# Altium PCB PCB 0817.PcbDoc (part 2 of 2)
Units mil, origin at the board's own origin, x right, y up, seen from the top; angles counter-clockwise.
Board outline 9370 x 8640 mil, 2 copper layers (Top Layer, Bottom Layer); 60 components, 203 nets, 811 pads, 245 vias.
Unrouted connection lines stored in the file: 129.
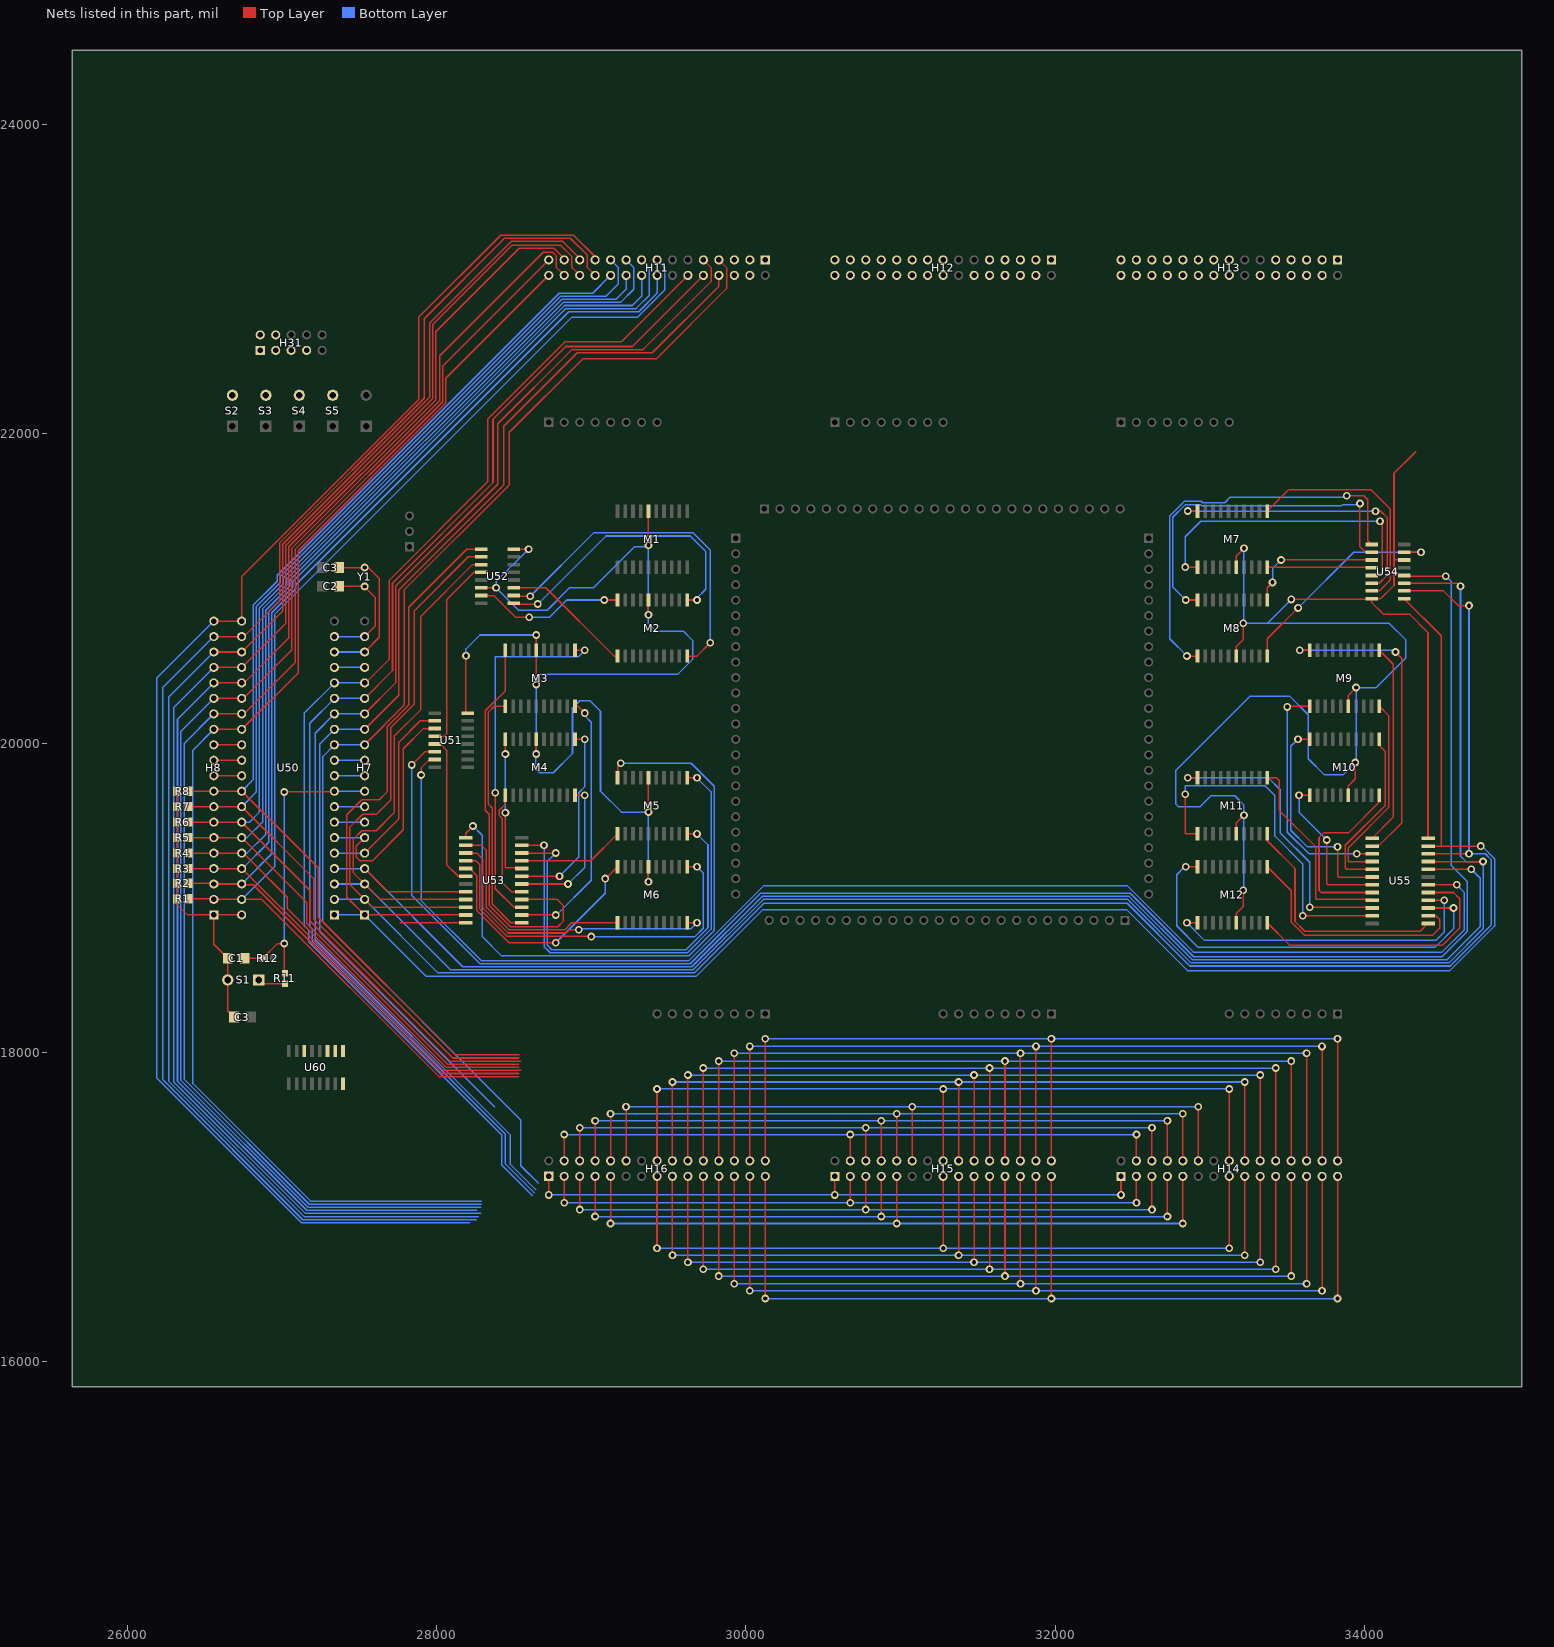
[diagram p2: the nets of this part, all layers, seen from the top]

## Via types
v1: diameter 50, hole 28, Top Layer to Bottom Layer, 245 vias

## Nets (pads, with @x,y where several pads share a name; then routed paths per layer and width w, separated by ;. In a path a pad name is that pad's centre, name@x,y a point inside that pad or via, vN(x,y) a via of type N, cw(c..) or ccw(c..) an arc to the next point about the centre after c; other vN are vias at no path point) (continued)
NetM2_1: M2.1 U52.11 | length 852.4
  Top Layer w10: U52.11@28500.32,21005 28706.57,21005 29147.67,20563.9 M2.1@29170,20563.9
NetM2_10: M2.10 U52.10 | length 2265.7
  Top Layer w10: U52.10@28505.32,20950 v1(28605,20950) ; M2.10@29620,20563.9 29683.9,20563.9 v1(29770,20650)
  Bottom Layer w10: v1(28605,20950) 29015,21360 29660,21360 29770,21250 v1(29770,20650)
NetM2_11: M2.11 U52.9 | length 1859.4
  Top Layer w10: U52.9@28505.32,20900 v1(28655,20900) ; M2.11@29620,20926.1 v1(29683.9,20926.1)
  Bottom Layer w10: v1(28655,20900) 29095,21340 29640,21340 29740,21240 29740,20995 29683.9,20938.9 v1(29683.9,20926.1)
NetM2_20: M2.20 U52.7 | length 984.3
  Top Layer w10: U52.7@28289.69,20955 28370,20955 28510,20815 v1(28600,20815) ; v1(29083.9,20926.1) M2.20@29170,20926.1
  Bottom Layer w10: v1(28600,20815) 28730,20815 28841.1,20926.1 v1(29083.9,20926.1)
NetM3_1: M3.1 U53.1 | length 1618.3
  Top Layer w10: M3.1@28445,20238.9 28372.18,20238.9 28335,20201.72 28335,19605 28360,19580 28360,18960 28480,18840 U53.1@28551.1,18840
NetM3_10: M3.10 U53.2 | length 1736.2
  Top Layer w10: U53.2@28551.1,18890 v1(28770,18890) ; M3.10@28895,20238.9 28915,20238.9 v1(28958.9,20195)
  Bottom Layer w10: v1@28755,18890 28775,18890 29000,19115 29000,20135 28958.9,20176.1 v1(28958.9,20195)
NetM3_11: M3.11 U53.3 | length 2385.6
  Top Layer w10: v1(28380,19680) 28380,19060 28500,18940 U53.3@28551.1,18940 ; M3.11@28895,20601.1 v1(28958.9,20601.1)
  Bottom Layer w10: v1@28380,19675 v1(28380,19680) 28380,20560 28917.8,20560 v1(28958.9,20601.1)
NetM3_20: M3.20 U53.4 | length 2651.7
  Top Layer w10: M3.20@28445,20601.1 28445,20340 28315,20210 28315,19566.72 28340,19541.72 28340,18951.72 28478.53,18813.19 28783.19,18813.19 28820,18850 28820,18950 28780,18990 U53.4@28551.1,18990
NetM4_1: M4.1 U53.5 | length 739.7
  Top Layer w10: M4.1@28445,19663.9 28445,19606.57 28405,19566.57 28405,19533.43 28425,19513.43 28425,19100 28485,19040 U53.5@28551.1,19040
NetM4_10: M4.10 U53.6 | length 981.8
  Top Layer w10: U53.6@28551.1,19090 v1(28850,19090) ; M4.10@28895,19663.9 v1(28958.9,19663.9)
  Bottom Layer w10: v1(28850,19090) 28958.9,19198.9 v1(28958.9,19663.9)
NetM4_11: M4.11 U53.7 | length 1261.8
  Top Layer w10: U53.7@28551.1,19140 v1(28795,19140) ; M4.11@28895,20026.1 v1(28958.9,20026.1)
  Bottom Layer w10: v1(28795,19140) 28918.9,19263.9 28918.9,19680.47 28958.9,19720.47 v1(28958.9,20026.1)
NetM4_20: M4.20 U53.8 | length 939.3
  Top Layer w10: v1(28445,19550) 28445,19195 28546.1,19195 U53.8@28551.1,19190 ; v1(28445,19930) M4.20@28445,20026.1
  Bottom Layer w10: v1(28445,19550) v1(28445,19930)
NetM5_1: M5.1 U53.9 | length 690.9
  Top Layer w10: U53.9@28551.1,19240 28996.1,19240 M5.1@29170,19413.9
NetM5_10: M5.10 U53.10 | length 2648.4
  Top Layer w10: U53.10@28551.1,19290 v1(28770,19290) ; M5.10@29620,19413.9 v1(29683.9,19413.9)
  Bottom Layer w10: v1(28770,19290) 28715,19235 28715,18695 28745,18665 29613.43,18665 29755,18806.57 29755,19342.8 v1(29683.9,19413.9)
NetM5_11: M5.11 U53.11 | length 3038.4
  Top Layer w10: U53.11@28551.1,19340 v1(28695,19340) ; M5.11@29620,19776.1 v1(29683.9,19776.1)
  Bottom Layer w10: v1(28695,19340) 28695,18685 28735,18645 29621.72,18645 29775,18798.28 29775,19685 v1(29683.9,19776.1)
NetM5_20: M5.20 U53.13 | length 4154.3
  Top Layer w10: U53.13@28188.9,19390 28188.9,19418.9 v1(28235,19465) ; M5.20@29170,19776.1 29170,19850 v1(29190,19870)
  Bottom Layer w10: v1(28235,19465) 28295,19405 28295,18750 28420,18625 29630,18625 29795,18790 29795,19721.57 29646.57,19870 v1(29190,19870)
NetM6_1: M6.1 U53.14 | length 1441.3
  Top Layer w10: U53.14@28188.9,19340 28290,19340 28320,19310 28320,18943.43 28470.24,18793.19 28828.28,18793.19 28873.99,18838.9 M6.1@29170,18838.9
NetM6_10: M6.10 U53.15 | length 1984.6
  Top Layer w10: U53.15@28188.9,19290 28260,19290 28300,19250 28300,18935.15 28461.96,18773.19 28836.57,18773.19 28858.38,18795 v1(28920,18795) ; M6.10@29620,18838.9 v1(29683.9,18838.9)
  Bottom Layer w10: v1(28920,18795) 28925,18800 29645,18800 v1(29683.9,18838.9)
NetM6_11: M6.11 U53.16 | length 2406.8
  Top Layer w10: U53.16@28188.9,19240 28255,19240 28280,19215 28280,18926.86 28453.67,18753.19 28996.81,18753.19 v1(29000,18750) ; M6.11@29620,19201.1 v1(29683.9,19201.1)
  Bottom Layer w10: v1(29000,18750) 29670.15,18750 29723.9,18803.75 29723.9,19161.1 v1(29683.9,19201.1)
NetM6_20: M6.20 U53.17 | length 1571.8
  Top Layer w10: U53.17@28188.9,19190 28215.23,19190 28260,19145.23 28260,18918.58 28468.58,18710 v1(28770,18710) ; v1(29090,19125) 29093.9,19125 M6.20@29170,19201.1
  Bottom Layer w10: v1(28770,18710) 29090,19030 v1(29090,19125)
NetM7_1: M7.1 U54.15 | length 1513.6
  Top Layer w10: M7.1@33370,21501.1 33508.9,21640 34040,21640 34165,21515 34165,21055 34095,20985 U54.15@34044.68,20985
NetM7_10: M7.10 U54.14 | length 1865.4
  Top Layer w10: v1(32856.1,21501.1) M7.10@32920,21501.1 ; U54.14@34044.68,21035 34095,21035 34145,21085 34145,21460 34105,21500 v1(34070,21500)
  Bottom Layer w10: v1(32856.1,21501.1) v1@34070,21501.1
NetM7_11: M7.11 U54.13 | length 1986.5
  Top Layer w10: v1(32840,21138.9) M7.11@32920,21138.9 ; U54.13@34044.68,21085 34085,21085 34115,21115 34115,21420 v1(34100,21435)
  Bottom Layer w10: v1(32840,21138.9) 32840,21335 32940,21435 v1(34100,21435)
NetM7_20: M7.20 U54.12 | length 670.8
  Top Layer w10: M7.20@33370,21138.9 U54.12@34040.79,21138.9
NetM8_1: M8.1 U54.11 | length 880.9
  Top Layer w10: M8.1@33370,20926.1 33370,21005 v1(33405,21040) ; v1(33460,21185) U54.11@34044.68,21185
  Bottom Layer w10: v1(33405,21040) 33405,21130 v1(33460,21185)
NetM8_10: M8.10 U54.10 | length 2267.2
  Top Layer w10: v1(32843.9,20926.1) M8.10@32920,20926.1 ; v1(33970,21550) 33970,21270 34005,21235 U54.10@34044.68,21235
  Bottom Layer w10: v1(32843.9,20926.1) 32760,21010 32760,21461.57 32839.53,21541.1 32939.05,21541.1 32945.15,21535 33848.28,21535 33854.39,21541.1 33961.1,21541.1 v1(33970,21550)
NetM8_11: M8.11 U54.9 | length 2673.6
  Top Layer w10: v1(32851.1,20563.9) M8.11@32920,20563.9 ; v1(33885,21600) 33995,21600 34020,21575 34020,21309.68 U54.9@34044.68,21285
  Bottom Layer w10: v1(32851.1,20563.9) 32740,20675 32740,21469.85 32835.15,21565 32943.43,21565 32953.43,21555 33095,21555 33130,21590 33875,21590 v1(33885,21600)
NetM8_20: M8.20 U54.7 | length 1447.7
  Top Layer w10: M8.20@33370,20563.9 33370,20675 v1(33570,20875) ; U54.7@34255.31,21235 v1(34365,21235)
  Bottom Layer w10: v1(33570,20875) 33930,21235 v1(34365,21235)
NetM9_1: M9.1 U55.1 | length 1310.3
  Top Layer w10: U55.1@34047.64,19385 34185,19522.36 34185,20511.1 M9.1@34095,20601.1
NetM9_10: M9.10 U55.2 | length 2021.1
  Top Layer w10: v1(33581.1,20601.1) M9.10@33645,20601.1 ; U55.2@34090,19335 34240,19485 34240,20550 v1(34200,20590)
  Bottom Layer w10: v1(33581.1,20601.1) 34188.9,20601.1 v1(34200,20590)
NetM9_11: M9.11 U55.3 | length 1568.5
  Top Layer w10: v1(33500,20235) 33503.9,20238.9 M9.11@33645,20238.9 ; v1(33950,19285) U55.3@34048.9,19285
  Bottom Layer w10: v1@33500,20240 v1(33500,20235) 33500,19425 33640,19285 v1(33950,19285)
NetM9_20: M9.20 U55.4 | length 1289.1
  Top Layer w10: U55.4@34047.64,19235 33895,19235 33895,19325 34155,19585 34155,20178.9 M9.20@34095,20238.9
NetM10_1: M10.1 U55.5 | length 1130.8
  Top Layer w10: U55.5@34047.64,19185 33885,19185 33875,19195 33875,19340 34133.36,19598.36 34133.36,19946.64 34095,19985 M10.1@34095,20026.1
NetM10_10: M10.10 U55.6 | length 1445.4
  Top Layer w10: v1(33568.9,20026.1) M10.10@33645,20026.1 ; v1(33825,19330) 33825,19140 33830,19135 U55.6@34047.64,19135
  Bottom Layer w10: v1(33568.9,20026.1) 33522.8,19980 33522.8,19437.2 33630,19330 v1(33825,19330)
NetM10_11: M10.11 U55.7 | length 1011.6
  Top Layer w10: v1(33576.1,19663.9) M10.11@33645,19663.9 ; v1(33755,19375) 33755,19090 33760,19085 U55.7@34047.64,19085
  Bottom Layer w10: v1(33576.1,19663.9) 33576.1,19553.9 v1(33755,19375)
NetM10_20: M10.20 U55.8 | length 1218
  Top Layer w10: U55.8@34047.64,19035 33720,19035 33705,19050 33705,19390 33735,19420 33895,19420 34095,19620 M10.20@34095,19663.9
NetM11_1: M11.1 U55.9 | length 1310.7
  Top Layer w10: M11.1@33370,19776.1 33432.33,19776.1 33448.31,19760.12 33448.31,19565.59 33685,19328.9 33685,18990 U55.9@34042.64,18990
NetM11_10: M11.10 U55.10 | length 1937.7
  Top Layer w10: v1(32856.1,19776.1) M11.10@32920,19776.1 ; v1(33645,18940) 34042.64,18940 U55.10@34047.64,18935
  Bottom Layer w10: v1(32856.1,19776.1) 33378.9,19776.1 33455,19700 33455,19420 33645,19230 v1(33645,18940)
NetM11_11: M11.11 U55.11 | length 2296.8
  Top Layer w10: v1(32840,19670) 32840,19413.9 M11.11@32920,19413.9 ; v1(33600,18885) U55.11@34047.64,18885
  Bottom Layer w10: v1(32840,19670) 32840,19726.1 33353.9,19726.1 33420,19660 33420,19400 33600,19220 v1(33600,18885)
NetM11_20: M11.20 U55.13 | length 1546.9
  Top Layer w10: M11.20@33370,19413.9 33370,19370 33550,19190 33550,18848.28 33613.28,18785 34359.84,18785 U55.13@34409.84,18835
NetM12_1: M12.1 U55.14 | length 1574.7
  Top Layer w10: M12.1@33370,19201.1 33525,19046.1 33525,18845 33610,18760 34440,18760 34485,18805 34485,18860 34460,18885 U55.14@34409.84,18885
NetM12_10: M12.10 U55.15 | length 2684
  Top Layer w10: v1(32843.9,19201.1) M12.10@32920,19201.1 ; U55.15@34409.84,18935 v1(34575,18935)
  Bottom Layer w10: v1(32843.9,19201.1) 32836.1,19201.1 32785,19150 32785,18820 32925,18680 34455,18680 34575,18800 v1(34575,18935)
NetM12_11: M12.11 U55.16 | length 2112.9
  Top Layer w10: v1(32851.1,18838.9) M12.11@32920,18838.9 ; U55.16@34409.84,18985 v1(34515,18985)
  Bottom Layer w10: v1(32851.1,18838.9) 32965,18725 34460,18725 34515,18780 v1(34515,18985)
NetM12_20: M12.20 U55.17 | length 1761.9
  Top Layer w10: M12.20@33370,18838.9 33513.9,18695 34505,18695 34615,18805 34615,18995 34575,19035 U55.17@34409.84,19035
NetR11_1: R11.1 S1.1 | length 179.7
  Top Layer w10: S1.1@26850,18470 26873.46,18446.54 R11.1@27020,18446.54
NetU51_4: U51.4 U52.4 | length 1247.7
  Top Layer w10: U51.4@27989.69,20045 28050,20045 28065,20060 28065,20928.28 28241.72,21105 U52.4@28289.69,21105
NetU51_5: U51.5 U53.18 | length 986.8
  Top Layer w10: U51.5@27989.69,19995 28025,19995 28065,19955 28065,19215 28140,19140 U53.18@28188.9,19140
NetU51_6: U51.6 U54.4 | length 11093.5
  Top Layer w10: v1(27840,19860) 27925,19945 U51.6@27989.69,19945 ; U54.4@34255.31,21085 34260.31,21080 v1@34530,21080
  Bottom Layer w10: v1(27840,19860) 27840,19015 28280,18575 29640,18575 30095,19030 32484.85,19030 32894.85,18620 34500,18620 34665,18785 34665,19105 34560,19210 34560,21045 v1(34525,21080)
NetU51_7: U51.7 U55.18 | length 8810
  Top Layer w10: v1(27900,19795) 27900,19840 27955,19895 U51.7@27989.69,19895 ; U55.18@34414.84,19085 v1@34600,19085
  Bottom Layer w10: v1(27900,19795) 27900,18983.28 28288.28,18595 29631.72,18595 30116.72,19080 32463.14,19080 32893.14,18650 34500,18650 34645,18795 34645,19035 v1(34595,19085)
OS0: H11.3 H12.3 H13.3 H14.3 H15.3 H16.3 H31.1 S2.2 | length 4210
  Top Layer w10: v1(28825,17030) H16.3@28825,17200 ; v1(30675,17030) H15.3@30675,17200 ; v1(32525,17030) H14.3@32525,17200
  Bottom Layer w10: v1(28825,17030) v1(32525,17030)
OS1: H11.4 H12.4 H13.4 H14.4 H15.4 H16.4 H31.3 S3.2 | length 4210
  Top Layer w10: H16.4@28825,17300 v1(28825,17470) ; H15.4@30675,17300 v1(30675,17470) ; H14.4@32525,17300 v1(32525,17470)
  Bottom Layer w10: v1(28825,17470) v1(32525,17470)
OS2: H11.5 H12.5 H13.5 H14.5 H15.5 H16.5 H31.5 S4.2 | length 4359.1
  Top Layer w10: v1(28925,16985) H16.5@28925,17200 ; v1(30775,16985) H15.5@30775,17200 ; v1(32625,16985) H14.5@32625,17200
  Bottom Layer w10: v1@28930,16980 v1(28925,16985) v1(32625,16985) v1@32630,16980
P1: H7.1 U50.1 U52.1 U53.23 U54.1 U55.23 | length 14270.3
  Top Layer w10: U53.23@28188.9,18890 H7.1@27535,18890 27420,19005 27420,19537.97 27516.56,19634.53 27629.53,19634.53 27680,19685 27680,20106.72 27820,20246.72 27820,20880 28195,21255 U52.1@28289.69,21255 ; U54.1@34255.31,20935 34255.31,20934.69 34495,20695 34495,19335 ; U55.23@34411.1,19335 34495,19335 ; v1(34750,19335) 34495,19335
  Bottom Layer w10: U50.1@27340,18890 H7.1@27535,18890 27930,18495 29680,18495 30110,18925 32460.27,18925 32855,18530.27 32855,18530 34551.57,18530 34840,18818.43 34840,19253.28 34758.28,19335 v1(34750,19335)
P2: H7.2 U50.2 U52.2 U53.22 U54.2 U55.22 | length 14432.4
  Top Layer w10: U53.22@28188.9,18940 27585,18940 H7.2@27535,18990 27440,19085 27440,19457.97 27520,19537.97 27520,19540 27610,19540 27705,19635 27705,20103.43 27855,20253.43 27855,20855 28205,21205 U52.2@28289.69,21205 ; U54.2@34255.31,20985 34510,20985 34605,20890 v1(34675,20890) ; U55.22@34411.1,19285 v1(34675,19285)
  Bottom Layer w10: U50.2@27340,18990 H7.2@27535,18990 28010,18515 29666.57,18515 30116.57,18965 32465,18965 32870,18560 34553.28,18560 34820,18826.72 34820,19245 34780,19285 v1(34675,19285) v1(34675,20890)
P3: H7.3 U50.3 U52.3 U53.21 U54.3 U55.21 | length 14396.5
  Top Layer w10: U53.21@28188.9,18990 27635,18990 H7.3@27535,19090 27460,19165 27460,19377.97 27516.56,19434.53 27609.53,19434.53 27725,19550 27725,20045 27898.69,20218.69 27898.69,20821.31 28232.39,21155 U52.3@28289.69,21155 ; U54.3@34255.31,21035 34600,21035 v1(34620,21015) ; U55.21@34411.1,19235 v1(34765,19235)
  Bottom Layer w10: U50.3@27340,19090 H7.3@27535,19090 28090,18535 29658.28,18535 30113.28,18990 32468.28,18990 32878.28,18580 34545,18580 34768.28,18803.28 34768.28,19231.72 v1(34765,19235) 34655,19235 34620,19270 v1(34620,21015)
P4: H7.4 U50.4 U53.20 U55.20 | length 9507.7
  Top Layer w10: H7.4@27535,19190 27685,19040 U53.20@28188.9,19040 ; U55.20@34411.1,19185 v1(34690,19185)
  Bottom Layer w10: U50.4@27340,19190 H7.4@27535,19190 28170,18555 29650,18555 30105,19010 32476.57,19010 32886.57,18600 34533.28,18600 34748.28,18815 34748.28,19126.72 v1(34690,19185)
P5: H7.5 U50.5 U51.2 | length 1293.8
  Top Layer w10: H7.5@27535,19290 27755,19510 27755,20005 27895,20145 U51.2@27989.69,20145
  Bottom Layer w10: U50.5@27340,19290 H7.5@27535,19290
P6: H7.6 U50.6 U51.3 | length 1524.5
  Top Layer w10: H7.6@27535,19390 27480,19335 27480,19265 27505,19240 27585,19240 27785,19440 27785,19965 27915,20095 U51.3@27989.69,20095
  Bottom Layer w10: U50.6@27340,19390 H7.6@27535,19390
P7: H7.7 U50.7 U60.1 | length 195
  Bottom Layer w10: U50.7@27340,19490 H7.7@27535,19490
P8: H7.8 U50.8 U60.2 | length 195
  Bottom Layer w10: U50.8@27340,19590 H7.8@27535,19590
P9: C1.2 H7.9 R11.2 R12.2 U50.9 | length 1983
  Top Layer w10: C1.2@26760,18610 R12.2@26876.54,18610 26971.54,18705 v1(27015,18705) R11.2@27015,18518.46 ; v1(27015,19685) 27335,19685 U50.9@27340,19690
  Bottom Layer w10: v1(27015,18705) v1(27015,19685) ; U50.9@27340,19690 H7.9@27535,19690
P10: H7.10 U50.10 | length 195
  Bottom Layer w10: U50.10@27340,19790 H7.10@27535,19790
P11: H7.11 U50.11 | length 195
  Bottom Layer w10: U50.11@27340,19890 H7.11@27535,19890
P12: H7.12 H11.7 H12.7 H13.7 H14.7 H15.7 H16.7 U50.12 | length 12521.2
  Top Layer w10: H7.12@27535,19990 27790,20245 27790,20990 28470,21670 28470,22010 28945,22485 29420,22485 29875,22940 29875,23075.29 H11.7@29825.33,23124.96 ; v1(29025,16940) H16.7@29025,17200 ; v1(30875,16940) H15.7@30875,17200 ; v1(32725,16940) H14.7@32725,17200
  Bottom Layer w10: H7.12@27535,19990 U50.12@27340,19990 27265,19915 27265,18845 28545,17565 28545,17268.28 28658.28,17155 ; v1(29025,16940) v1(32725,16940)
P13: H7.13 H11.8 H12.8 H13.8 H14.8 H15.8 H16.8 U50.13 | length 11790.2
  Top Layer w10: H7.13@27535,20090 27755,20310 27755,20990 28435,21670 28435,22050 28910,22525 29395,22525 29825.33,22955.33 H11.8@29825.33,23024.96 ; H16.8@29025,17300 v1(29025,17560) ; H15.8@30875,17300 v1(30875,17560) ; H14.8@32725,17300 v1(32725,17560)
  Bottom Layer w10: H7.13@27535,20090 U50.13@27340,20090 27245,19995 27245,18780 28375,17650 ; v1(29025,17560) v1(32725,17560)
P14: H7.14 H11.9 H12.9 H13.9 H14.9 H15.9 H16.9 U50.14 | length 12694
  Top Layer w10: H7.14@27535,20190 27735,20390 27735,21015 28395,21675 28395,22065 28875,22545 29335,22545 29775,22985 29775,23075.29 H11.9@29725.33,23124.96 ; v1(29125,16895) H16.9@29125,17200 ; v1(30975,16895) H15.9@30975,17200 ; v1(32825,16895) H14.9@32825,17200
  Bottom Layer w10: H7.14@27535,20190 U50.14@27340,20190 27215,20065 27215,18730 28475,17470 28475,17280 28640,17115 ; v1@29130,16890 v1(29125,16895) v1(32825,16895) v1@32830,16890
P15: H7.15 H11.10 H12.10 H13.10 H14.10 H15.10 H16.10 U50.15 | length 12580.4
  Top Layer w10: H7.15@27535,20290 27715,20470 27715,21035 28365,21685 28365,22095 28835,22565 29265.37,22565 H11.10@29725.33,23024.96 ; H16.10@29125,17300 v1(29125,17605) ; H15.10@30975,17300 v1(30975,17605) ; H14.10@32825,17300 v1(32825,17605)
  Bottom Layer w10: H7.15@27535,20290 U50.15@27340,20290 27180,20130 27180,18815 27195,18800 27195,18721.72 28445,17471.72 28445,17280 28630,17095 ; v1@29130,17610 v1(29125,17605) v1(32825,17605) v1@32830,17610
P16: H7.16 H11.12 H12.12 H13.12 H14.12 H15.12 H16.12 U50.16 | length 12669.5
  Top Layer w10: H7.16@27535,20390 27540,20390 27695,20545 27695,21055 28330,21690 28330,22095 28830,22595 29195.37,22595 H11.12@29625.33,23024.96 ; H16.12@29225,17300 v1(29225,17650) ; H15.12@31075,17300 v1(31075,17650) ; H14.12@32925,17300 v1(32925,17650)
  Bottom Layer w10: H7.16@27535,20390 U50.16@27340,20390 27145,20195 27145,18820 27175,18790 27175,18713.43 28420,17468.43 28420,17275 28620,17075 ; v1(29225,17650) v1(32925,17650)
P17: H7.17 U50.17 U60.3 | length 195
  Bottom Layer w10: U50.17@27340,20490 H7.17@27535,20490
P18: C3.2@27370.12,21135 H7.18 U50.18 Y1.1 | length 997.6
  Top Layer w10: C3.2@27371.14,21136.02 Y1.1@27535,21136.02 27558.98,21136.02 27630,21065 27630,20685 H7.18@27535,20590
  Bottom Layer w10: U50.18@27340,20590 H7.18@27535,20590
P19: C2.1 H7.19 U50.19 Y1.2 | length 740.8
  Top Layer w10: C2.1@27371.14,21013.98 Y1.2@27535,21013.98 27535,21010 27605,20940 27605,20760 H7.19@27535,20690
  Bottom Layer w10: U50.19@27340,20690 H7.19@27535,20690
P21: H8.20 H11.23 H12.23 H13.23 H14.23 H15.23 H16.23 U50.21 | length 15211.3
  Top Layer w10: H8.20@26560,20790 U50.21@26740,20790 26740,21077.99 27885,22222.99 27885,22755 28415,23285 28885,23285 29025.33,23144.67 H11.23@29025.33,23124.96 ; v1(29825,16555) H16.23@29825,17200 ; v1(31675,16555) H15.23@31675,17200 ; v1(33525,16555) H14.23@33525,17200
  Bottom Layer w10: H8.20@26560,20790 26190,20420 26190,17837.01 27127.01,16900 28215,16900 ; v1(29825,16555) v1(33525,16555)
P22: H8.19 H11.24 H12.24 H13.24 H14.24 H15.24 H16.24 U50.22 | length 15235.8
  Top Layer w10: H8.19@26560,20690 U50.22@26740,20690 26755,20690 26985,20920 26985,21294.71 27920,22229.71 27920,22745 28440,23265 28865,23265 28975,23155 28975,23075.29 H11.24@29025.33,23024.96 ; H16.24@29825,17300 v1(29825,17945) ; H15.24@31675,17300 v1(31675,17945) ; H14.24@33525,17300 v1(33525,17945)
  Bottom Layer w10: H8.19@26560,20690 26230,20360 26230,17825.29 27135.29,16920 28255,16920 ; v1(29825,17945) v1(33525,17945)
P23: H8.18 H11.25 H12.25 H13.25 H14.25 H15.25 H16.25 U50.23 | length 15096.9
  Top Layer w10: H8.18@26560,20590 U50.23@26740,20590 27005,20855 27005,21286.42 27955,22236.42 27955,22715 28485,23245 28815,23245 28925.33,23134.67 H11.25@28925.33,23124.96 ; v1(29925,16505) H16.25@29925,17200 ; v1(31775,16505) H15.25@31775,17200 ; v1(33625,16505) H14.25@33625,17200
  Bottom Layer w10: H8.18@26560,20590 26270,20300 26270,17813.58 27143.58,16940 28270,16940 ; v1(29925,16505) v1(33625,16505)
P24: H8.17 H11.26 H12.26 H13.26 H14.26 H15.26 H16.26 U50.24 | length 15102.7
  Top Layer w10: H8.17@26560,20490 U50.24@26740,20490 27025,20775 27025,21278.14 27975,22228.14 27975,22706.72 28488.28,23220 28802.01,23220 28875,23147.01 28875,23075.29 H11.26@28925.33,23024.96 ; H16.26@29925,17300 v1(29925,17995) ; H15.26@31775,17300 v1(31775,17995) ; H14.26@33625,17300 v1(33625,17995)
  Bottom Layer w10: H8.17@26560,20490 26300,20230 26300,17811.86 27151.86,16960 28285,16960 ; v1(29925,17995) v1(33625,17995)
P25: H8.16 H11.27 H12.27 H13.27 H14.27 H15.27 H16.27 U50.25 | length 14942.5
  Top Layer w10: H8.16@26560,20390 U50.25@26740,20390 26755,20390 27045,20680 27045,21269.85 27995,22219.85 27995,22660 28534.96,23199.96 28760.04,23199.96 28825.33,23134.67 H11.27@28825.33,23124.96 ; v1(30025,16460) H16.27@30025,17200 ; v1(31875,16460) H15.27@31875,17200 ; v1(33725,16460) H14.27@33725,17200
  Bottom Layer w10: H8.16@26560,20390 26325,20155 26325,17815.15 27160.15,16980 28260,16980 ; v1(30025,16460) v1(33725,16460)
P26: H8.15 H11.28 H12.28 H13.28 H14.28 H15.28 H16.28 U50.26 | length 14876.5
  Top Layer w10: H8.15@26560,20290 U50.26@26740,20290 26750,20290 27065,20605 27065,21261.57 28020,22216.57 28020,22505 28689.96,23174.96 28750.04,23174.96 28775,23150 28775,23075.29 H11.28@28825.33,23024.96 ; H16.28@30025,17300 v1(30025,18040) ; H15.28@31875,17300 v1(31875,18040) ; H14.28@33725,17300 v1(33725,18040)
  Bottom Layer w10: H8.15@26560,20290 26345,20075 26345,17823.43 27168.43,17000 28285,17000 ; v1(30025,18040) v1(33725,18040)
P27: H8.14 H11.29 H12.29 H13.29 H14.29 H15.29 H16.29 U50.27 | length 14712.2
  Top Layer w10: H8.14@26560,20190 U50.27@26740,20190 26755,20190 27085,20520 27085,21253.28 28040,22208.28 28040,22439.63 H11.29@28725.33,23124.96 ; v1(30125,16410) H16.29@30125,17200 ; v1(31975,16410) H15.29@31975,17200 ; v1(33825,16410) H14.29@33825,17200
  Bottom Layer w10: H8.14@26560,20190 26370,20000 26370,17826.72 27176.72,17020 28290,17020 ; v1(30125,16410) v1(33825,16410)
P28: H8.13 H11.30 H12.30 H13.30 H14.30 H15.30 H16.30 U50.28 | length 14533
  Top Layer w10: H8.13@26560,20090 U50.28@26740,20090 27105,20455 27105,21245 28060,22200 28060,22359.63 H11.30@28725.33,23024.96 ; H16.30@30125,17300 v1(30125,18090) ; H15.30@31975,17300 v1(31975,18090) ; H14.30@33825,17300 v1(33825,18090)
  Bottom Layer w10: H8.13@26560,20090 26425,19955 26425,17800 27185,17040 28290,17040 ; v1(30125,18090) v1(33825,18090)
P29: H8.12 U50.29 | length 180
  Top Layer w10: H8.12@26560,19990 U50.29@26740,19990
P30: H8.11 U50.30 | length 180
  Top Layer w10: H8.11@26560,19890 U50.30@26740,19890
P31: H8.10 U50.31 | length 180
  Top Layer w10: H8.10@26560,19790 U50.31@26740,19790
P32: H8.9 H11.22 H12.22 H13.22 H14.22 H15.22 H16.22 R8.2 U50.32 | length 12981.3
  Top Layer w10: R8.2@26397.4,19690 H8.9@26560,19690 U50.32@26740,19690 27235,19195 27235,18875 28125,17985 28535,17985 ; H16.22@29725,17300 v1(29725,17900) ; H15.22@31575,17300 v1(31575,17900) ; H14.22@33425,17300 v1(33425,17900)
  Bottom Layer w10: U50.32@26740,19690 26815,19765 26815,20892.99 26970,21047.99 26970,21086.42 28793.58,22910 29010.37,22910 H11.22@29125.33,23024.96 ; v1(29725,17900) v1(33425,17900)
P33: H8.8 H11.21 H12.21 H13.21 H14.21 H15.21 H16.21 R7.2 U50.33 | length 13193.9
  Top Layer w10: R7.2@26397.4,19590 H8.8@26560,19590 U50.33@26740,19590 27205,19125 27205,18865 28105,17965 28530,17965 ; v1(29725,16600) H16.21@29725,17200 ; v1(31575,16600) H15.21@31575,17200 ; v1(33425,16600) H14.21@33425,17200
  Bottom Layer w10: U50.33@26740,19590 26835,19685 26835,20884.71 26990,21039.71 26990,21078.14 28801.86,22890 29095.04,22890 29175,22969.96 29175,23075.29 H11.21@29125.33,23124.96 ; v1(29725,16600) v1(33425,16600)
P34: H8.7 H11.20 H12.20 H13.20 H14.20 H15.20 H16.20 R6.2 U50.34 | length 13067.4
  Top Layer w10: R6.2@26397.4,19490 H8.7@26560,19490 U50.34@26740,19490 27180,19050 27180,18851.72 28086.72,17945 28545,17945 ; H16.20@29625,17300 v1(29625,17855) ; H15.20@31475,17300 v1(31475,17855) ; H14.20@33325,17300 v1(33325,17855)
  Bottom Layer w10: U50.34@26740,19490 26790,19490 26855,19555 26855,20876.42 27010,21031.42 27010,21069.85 28810.15,22870 29160,22870 29225.33,22935.33 H11.20@29225.33,23024.96 ; v1(29625,17855) v1(33325,17855)
P35: H8.6 H11.19 H12.19 H13.19 H14.19 H15.19 H16.19 R5.2 U50.35 | length 13227.2
  Top Layer w10: R5.2@26397.4,19390 H8.6@26560,19390 U50.35@26740,19390 27160,18970 27160,18835 28070,17925 28530,17925 ; v1(29625,16645) H16.19@29625,17200 ; v1(31475,16645) H15.19@31475,17200 ; v1(33325,16645) H14.19@33325,17200
  Bottom Layer w10: U50.35@26740,19390 26775,19390 26875,19490 26875,20868.14 27030,21023.14 27030,21061.57 28818.43,22850 29190,22850 29275,22935 29275,23075.29 H11.19@29225.33,23124.96 ; v1(29625,16645) v1(33325,16645)
P36: H8.5 H11.18 H12.18 H13.18 H14.18 H15.18 H16.18 R4.2 U50.36 | length 13062.3
  Top Layer w10: R4.2@26397.4,19290 H8.5@26560,19290 U50.36@26740,19290 26750,19290 27035,19005 27035,18931.72 28061.72,17905 28530,17905 ; H16.18@29525,17300 v1(29525,17810) ; H15.18@31375,17300 v1(31375,17810) ; H14.18@33225,17300 v1(33225,17810)
  Bottom Layer w10: U50.36@26740,19290 26775,19290 26895,19410 26895,20859.85 27050,21014.85 27050,21053.28 28826.72,22830 29265,22830 29325.33,22890.33 H11.18@29325.33,23024.96 ; v1(29525,17810) v1(33225,17810)
P37: H8.4 H11.17 H12.17 H13.17 H14.17 H15.17 H16.17 R3.2 U50.37 | length 13234.6
  Top Layer w10: R3.2@26397.4,19190 H8.4@26560,19190 U50.37@26740,19190 28045,17885 28545,17885 ; v1(29525,16690) H16.17@29525,17200 ; v1(31375,16690) H15.17@31375,17200 ; v1(33225,16690) H14.17@33225,17200
  Bottom Layer w10: U50.37@26740,19190 26745,19190 26915,19360 26915,20851.57 27070,21006.57 27070,21045 28835,22810 29290,22810 29375,22895 29375,23075.29 H11.17@29325.33,23124.96 ; v1(29525,16690) v1(33225,16690)
P38: H8.3 H11.16 H12.16 H13.16 H14.16 H15.16 H16.16 R2.2 U50.38 | length 13041.9
  Top Layer w10: R2.2@26397.4,19095 H8.3@26555,19095 ; H8.3@26560,19090 U50.38@26740,19090 26745,19085 26815,19085 28035,17865 28530,17865 ; H16.16@29425,17300 v1(29425,17765) ; H15.16@31275,17300 v1(31275,17765) ; H14.16@33125,17300 v1(33125,17765)
  Bottom Layer w10: U50.38@26740,19090 26935,19285 26935,20843.28 27090,20998.28 27090,21025 28855,22790 29306.72,22790 29425.33,22908.62 H11.16@29425.33,23024.96 ; v1(29425,17765) v1(33125,17765)
P39: H8.2 H11.15 H12.15 H13.15 H14.15 H15.15 H16.15 R1.2 U50.39 | length 13234.2
  Top Layer w10: R1.2@26397.4,18995 H8.2@26555,18995 ; H8.2@26560,18990 U50.39@26740,18990 26870,18990 28015,17845 28530,17845 ; v1(29425,16735) H16.15@29425,17200 ; v1(31275,16735) H15.15@31275,17200 ; v1(33125,16735) H14.15@33125,17200
  Bottom Layer w10: U50.39@26740,18990 26955,19205 26955,20835 28875,22755 29300,22755 29475,22930 29475,23075.29 H11.15@29425.33,23124.96 ; v1(29425,16735) v1(33125,16735)
RAGE: H11.6 H12.6 H13.6 H14.6 H15.6 H16.6 H31.7 S5.2 | length 4359.1
  Top Layer w10: H16.6@28925,17300 v1(28925,17515) ; H15.6@30775,17300 v1(30775,17515) ; H14.6@32625,17300 v1(32625,17515)
  Bottom Layer w10: v1@28930,17520 v1(28925,17515) v1(32625,17515) v1@32630,17520
VCC: C1.1 C3.2@26689.88,18230 H8.1 H11.1 H12.1 H13.1 H14.1 H15.1 H16.1 H31.2 H31.4 M1.16 M2.16 M3.16 M4.16 M5.16 M6.16 M7.16 M8.16 M9.16 M10.16 M11.16 M12.16 R1.1 R2.1 R3.1 R4.1 R5.1 R6.1 R7.1 R8.1 S1.2 U50.40 U51.16 U52.6 U52.16 U53.24 U54.6 U54.16 U55.24 U60.6 U60.16 | length 25309.4
  Top Layer w10: R8.1@26322.6,19690 R7.1@26322.6,19590 R6.1@26322.6,19490 R5.1@26322.6,19390 R4.1@26322.6,19290 R3.1@26322.6,19190 R2.1@26322.6,19095 R1.1@26322.6,18995 26322.6,18957.4 26390,18890 H8.1@26560,18890 ; S1.2@26649.76,18470.24 C1.1@26649.76,18610 26560,18699.76 H8.1@26560,18890 ; S1.2@26650,18470 26650,18269.88 C3.2@26689.88,18230 ; U50.40@26740,18890 H8.1@26560,18890 ; 27765,18840 U53.24@28188.9,18840 ; v1(28190,20565) 28190,20205.32 U51.16@28200.32,20195 ; U52.6@28289.69,21005 v1(28385,21005) ; U52.16@28500.32,21255 v1(28595,21255) ; v1@28645,19925 v1(28645,19930) M4.16@28645,20026.1 ; v1(28645,20380) M3.16@28645,20601.1 v1(28645,20700) ; v1(28725,17080) H16.1@28725,17200 ; v1@29370,19100 v1(29370,19105) M6.16@29370,19201.1 ; v1(29370,19555) M5.16@29370,19776.1 ; v1@29370,20825 v1(29370,20830) M2.16@29370,20926.1 ; v1(29370,21280) M1.16@29370,21501.1 ; v1(30575,17080) H15.1@30575,17200 ; v1(32425,17080) H14.1@32425,17200 ; M12.16@33170,18838.9 33170,18900 33215,18945 v1(33215,19050) ; M11.16@33170,19413.9 33170,19485 v1(33220,19535) ; M8.16@33170,20563.9 33170,20625 33215,20670 v1(33215,20775) ; M7.16@33170,21138.9 33170,21210 v1(33220,21260) ; v1(33525,20930) U54.16@34039.68,20930 ; M10.16@33895,19663.9 33895,19725 33940,19770 v1(33940,19875) ; M9.16@33895,20238.9 33895,20310 v1(33945,20360) ; U54.6@34255.31,21185 34190,21185 ; 34330,21885 34190,21745 34190,21185 ; U55.24@34409.84,19385 34409.84,20715.16 34290.16,20834.84 34120.16,20834.84 34044.68,20910.32 U54.16@34044.68,20935 34105,20935 34190,21020 34190,21185
  Bottom Layer w10: v1(28190,20565) 28190,20610 28280,20700 v1(28645,20700) ; v1(28595,21255) 28385,21045 v1(28385,21005) 28530,20860 28715,20860 28860,21005 29015,21005 29280,21270 29360,21270 v1(29370,21280) v1(29370,20830) 29370,20773.43 29418.43,20725 29594.85,20725 29655,20664.85 29655,20541.72 29558.28,20445 28663.28,20445 28650,20431.72 28650,20385 v1(28645,20380) v1(28645,19930) ; v1@28640,19925 28640,19835 28665,19810 28755,19810 28878.9,19933.9 28878.9,20228.14 28925.76,20275 28992.03,20275 29060,20207.03 29060,19690 29195,19555 v1(29370,19555) v1(29370,19105) ; v1(28725,17080) v1(32425,17080) ; v1(33215,20775) v1@33220,20775 ; v1@33220,19045 v1(33220,19535) 33220,19600 33160,19660 33006.57,19660 32936.57,19590 32795,19590 32795,19591.72 32780,19606.72 32780,19825 33260,20305 33514.85,20305 33635,20184.85 33635,19900 33740,19795 33860,19795 v1(33940,19875) ; v1(33220,21260) v1@33220,20775 ; v1(33525,20930) 33370,20775 ; v1@33945,19870 v1(33945,20360) 34075,20360 34265,20550 34265,20670 34160,20775 33370,20775 ; v1@33220,20775 33370,20775
pads on no net: H11.13 H12.13 H13.13 H14.13 H15.13 H16.13 M1.15 M2.15 M3.15 M4.15 M5.15 M6.15 M7.15 M8.15 M9.15 M10.15 M11.15 M12.15 U51.9 U51.10 U51.11 U51.12 U51.13 U51.14 U51.15 U60.11 U60.15

## Silkscreen, mask and mechanical layers (free items; w line width, h text height)
Top Overlay:
  lines w10: 30224.92,17125.29 28625.25,17125.29 28625.25,18325.25 30225.25,18325.25 30225,18325 30225,17125.21 ; 30225,22000 28625.33,22000 28625.33,23199.96 30225.33,23199.96 ; 30225.08,21999.92 30225.08,23199.71 ; 30414.21,14555.95 30434.21,14495.95 ; 30414.21,15635.91 30434.21,15695.91 ; 30424.21,14495.95 30444.21,14495.95 ; 30424.21,15695.91 30444.21,15695.91 ; 30433.96,14485.87 30433.96,14505.87 ; 30434.21,14710.05 30434.21,14495.95 ; 30434.21,15481.81 30434.21,15695.91 ; 30434.21,15685.91 30434.21,15705.91 ; 30454.21,14555.95 30434.21,14495.95 ; 30454.21,15635.91 30434.21,15695.91 ; 30493.96,14475.87 30433.96,14495.87 ; 30493.96,14515.87 30433.96,14495.87 ; 30494.21,15675.91 30434.21,15695.91 ; 30494.21,15715.91 30434.21,15695.91 ; 30958.05,14495.87 30433.96,14495.87 ; 30958.3,15695.91 30434.21,15695.91 ; 31509.88,14495.87 32033.96,14495.87 ; 31510.13,15695.91 32034.21,15695.91 ; 31973.96,14475.87 32033.96,14495.87 ; 31973.96,14515.87 32033.96,14495.87 ; 31974.21,15675.91 32034.21,15695.91 ; 31974.21,15715.91 32034.21,15695.91 ; 32013.98,14555.87 32033.96,14495.87 ; 32014.2,15635.91 32034.21,15695.91 ; 32023.96,14495.87 32043.96,14495.87 ; 32024.21,15695.91 32044.21,15695.91 ; 32033.96,14485.87 32033.96,14505.87 ; 32034.01,14710.01 32033.96,14495.87 ; 32034.17,15481.77 32034.21,15695.91 ; 32034.21,15685.91 32034.21,15705.91 ; 32053.98,14555.86 32033.96,14495.87 ; 32054.2,15635.9 32034.21,15695.91 ; 32074.67,17125.04 30475,17125.04 30475,18325 32075,18325 ; 32074.67,22000 30475,22000 30475,23199.96 32075,23199.96 ; 32074.75,17124.96 32074.75,18324.75 ; 32074.75,21999.92 32074.75,23199.71 ; 33924.67,17125.04 32325,17125.04 32325,18325 33925,18325 ; 33924.67,22000.04 32325,22000.04 32325,23200 33925,23200 ; 33924.75,17124.96 33924.75,18324.75 ; 33924.75,21999.96 33924.75,23199.75
  text "1600 (mil)" at 30968.3,15659.92 h60
  text "1199.958 (mil)" at 30398.22,15471.81 h60 r270
  text "1200.041 (mil)" at 32070,14720 h60 r89.99
  text "1600 (mil)" at 30968.05,14459.88 h60
Mechanical 1:
  the board outline again, w10

## Text inside footprints (layer, text, board x,y; h text height)
H11: Top Overlay "30" at 28585.33,23044.96 h50 r180; Top Overlay "29" at 28590.33,23144.96 h50 r180; Top Overlay "2" at 30295.33,23044.96 h50 r180; Top Overlay "1" at 30285.33,23144.96 h50 r180
H12: Top Overlay "30" at 30440,23044.96 h50 r180; Top Overlay "29" at 30440,23144.96 h50 r180; Top Overlay "2" at 32150,23044.96 h50 r180; Top Overlay "1" at 32140,23144.96 h50 r180
H13: Top Overlay "30" at 32290,23045 h50 r180; Top Overlay "29" at 32290,23145 h50 r180; Top Overlay "2" at 33995,23045 h50 r180; Top Overlay "1" at 33985,23145 h50 r180
H14: Top Overlay "30" at 33960,17280 h50; Top Overlay "29" at 33960,17180 h50; Top Overlay "2" at 32245,17280 h50; Top Overlay "1" at 32250,17180 h50
H15: Top Overlay "30" at 32105,17275 h50; Top Overlay "29" at 32110,17180 h50; Top Overlay "2" at 30410,17280 h50; Top Overlay "1" at 30420,17180 h50
H16: Top Overlay "30" at 30255.25,17280.25 h50; Top Overlay "29" at 30260.25,17180.25 h50; Top Overlay "2" at 28555.25,17280.25 h50; Top Overlay "1" at 28560.25,17180.25 h50
H31: Top Overlay "2" at 26760,22620 h50; Top Overlay "1" at 26780,22520 h50; Top Overlay "9" at 27320,22520 h50; Top Overlay "10" at 27320,22620 h50